# EAGLE board TFG_V.1.1 (EAGLE 9.6.2)

Size 100 x 80 mm. Coordinates in mm from the lower left corner, seen from the top.
Outline: 0,0 100,0 100,80 0,80 0,0
Copper layers (1*16): Top 0.035mm / dielectric 1.5mm / Bottom 0.035mm
Design rules "default": minimum track width 6mil, minimum drill 0.35mm, track to track 6mil, track to pad 6mil, pad to pad 6mil, via to via 6mil, smd to smd 6mil, copper to edge 40mil, drill to drill 6mil, minimum pad ring 10mil, minimum via ring 8mil, stop-mask expansion 4mil, vias tented up to drill 0mil, thermal gap 10mil

## Footprints (pad centres in the part's own frame; a part is rotated, then mirrored left to right if it is on the bottom)
C2.5-3 = drill 0.813 pad 1.6 octagon: 1 -1.27,0; 2 1.27,0
QFN40P800X800X100-69N = smd 0.85 x 0.2: 1 -3.95,3.2; 2 -3.95,2.8; 3 -3.95,2.4; 4 -3.95,2; 5 -3.95,1.6; 6 -3.95,1.2; 7 -3.95,0.8; 8 -3.95,0.4; 9 -3.95,0; 10 -3.95,-0.4; 11 -3.95,-0.8; 12 -3.95,-1.2; 13 -3.95,-1.6; 14 -3.95,-2; 15 -3.95,-2.4; 16 -3.95,-2.8; 17 -3.95,-3.2; 35 3.95,-3.2; 36 3.95,-2.8; 37 3.95,-2.4; 38 3.95,-2; 39 3.95,-1.6; 40 3.95,-1.2; 41 3.95,-0.8; 42 3.95,-0.4; 43 3.95,0; 44 3.95,0.4; 45 3.95,0.8; 46 3.95,1.2; 47 3.95,1.6; 48 3.95,2; 49 3.95,2.4; 50 3.95,2.8; 51 3.95,3.2 | smd 0.2 x 0.85: 18 -3.2,-3.95; 19 -2.8,-3.95; 20 -2.4,-3.95; 21 -2,-3.95; 22 -1.6,-3.95; 23 -1.2,-3.95; 24 -0.8,-3.95; 25 -0.4,-3.95; 26 0,-3.95; 27 0.4,-3.95; 28 0.8,-3.95; 29 1.2,-3.95; 30 1.6,-3.95; 31 2,-3.95; 32 2.4,-3.95; 33 2.8,-3.95; 34 3.2,-3.95; 52 3.2,3.95; 53 2.8,3.95; 54 2.4,3.95; 55 2,3.95; 56 1.6,3.95; 57 1.2,3.95; 58 0.8,3.95; 59 0.4,3.95; 60 0,3.95; 61 -0.4,3.95; 62 -0.8,3.95; 63 -1.2,3.95; 64 -1.6,3.95; 65 -2,3.95; 66 -2.4,3.95; 67 -2.8,3.95; 68 -3.2,3.95 | smd 5.8 x 5.8: 69 0,0
FUSAD1926W63L1550D250B = drill 0.83 pad 1.43: 1 -9.63,0; 2 9.63,0
5566-18 = drill 1.4 square: 1 16.8,-2.75; 2 12.6,-2.75; 3 8.4,-2.75; 4 4.2,-2.75; 5 0,-2.75; 6 -4.2,-2.75; 7 -8.4,-2.75; 8 -12.6,-2.75; 9 -16.8,-2.75; 10 16.8,2.75; 11 12.6,2.75; 12 8.4,2.75; 13 4.2,2.75; 14 0,2.75; 15 -4.2,2.75; 16 -8.4,2.75; 17 -12.6,2.75; 18 -16.8,2.75 | hole 3: 21.5,2.29; -21.5,2.29
5566-20 = drill 1.4 square: 1 18.9,-2.75; 2 14.7,-2.75; 3 10.5,-2.75; 4 6.3,-2.75; 5 2.1,-2.75; 6 -2.1,-2.75; 7 -6.3,-2.75; 8 -10.5,-2.75; 9 -14.7,-2.75; 10 -18.9,-2.75; 11 18.9,2.75; 12 14.7,2.75; 13 10.5,2.75; 14 6.3,2.75; 15 2.1,2.75; 16 -2.1,2.75; 17 -6.3,2.75; 18 -10.5,2.75; 19 -14.7,2.75; 20 -18.9,2.75 | hole 3: 23.6,2.29; -23.6,2.29
32005-201 = smd 3.1 x 0.5: 1 3,1.6; 2 3,0.8; 3 3,0; 4 3,-0.8; 5 3,-1.6 | smd 2.5 x 2: M1 -3,-4.45; M2 -3,4.45 | smd 3.3 x 2: M3 2.9,4.45; M4 2.9,-4.45 | hole 0.9: 0,2.2; 0,-2.2

## Placement (x,y rotation side)
C1  0.1uF  [C2.5-3]  17.78,76.2 0 top
IC1  CY8C4248LTQ-L485  [QFN40P800X800X100-69N]  57.15,44.45 180 top
U$1  FUSE  [FUSAD1926W63L1550D250B]  26.67,67.31 90 top
X2  5566-18  [5566-18]  22.86,26.67 270 top
X3  5566-20  [5566-20]  7.62,26.67 270 top
X4  MINI-USB-32005-201  [32005-201]  93.98,72.39 180 top

## Library data of the parts
C1 = capacitor-wima
IC1 = CY8C4248LTQ-L485; DESCRIPTION: ARM Microcontrollers - MCU PSoC4; HEIGHT: 1mm; MANUFACTURER_NAME: Infineon; MANUFACTURER_PART_NUMBER: CY8C4248LTQ-L485
U$1 = 52101-101-REV-A_v16
X2 X3 = con-molex; MF: MOLEX; OC_FARNELL: unknown; OC_NEWARK: unknown
X4 = con-cypressindustries; OC_FARNELL: unknown; OC_NEWARK: unknown

## Nets
DM: IC1.37 X4.2
DP: IC1.36 X4.3
FSR_A1: X2.1
FSR_A2: X2.2
FSR_A3: X2.3
FSR_A4: X2.4
FSR_A5: X2.5
FSR_A6: X2.6
FSR_A7: X2.7
FSR_A8: X2.8
FSR_A9: X2.9
FSR_A10: X2.10
FSR_A11: X2.11
FSR_A12: X2.12
FSR_A13: X2.13
FSR_A14: X2.14
FSR_B1: X3.1
FSR_B2: X3.2
FSR_B3: X3.3
FSR_B4: X3.4
FSR_B5: X3.5
FSR_B6: X3.6
FSR_B7: X3.7
FSR_B8: X3.8
FSR_B9: X3.9
FSR_B10: X3.10
FSR_B11: X3.11
FSR_B12: X3.12
FSR_B13: X3.13
FSR_B14: X3.14
FSR_B15: X3.15
FSR_B16: X3.16
GND: C1.2 X2.18 X3.20 X4.5
I2C_SCL: IC1.46 X2.17 X3.19
I2C_SDA: IC1.47 X2.16 X3.18
N$1: IC1.43
N$2: IC1.42
N$3: IC1.2
N$4: IC1.3
N$5: C1.1 U$1.2 X4.1
N$6: X4.4
N$7: IC1.55
N$8: IC1.54
N$9: IC1.56
N$10: IC1.57
N$11: IC1.58
N$12: IC1.59
N$13: IC1.62
N$14: IC1.63
N$15: IC1.4
N$16: IC1.5
N$17: IC1.6
N$18: IC1.7
N$19: IC1.8
N$20: IC1.9
N$21: IC1.12
N$22: IC1.13
N$23: IC1.14
N$24: IC1.15
N$25: IC1.16
N$26: IC1.17
N$27: IC1.19
N$28: IC1.20
N$29: IC1.21
N$30: IC1.22
N$31: IC1.23
N$32: IC1.24
N$33: IC1.25
N$34: IC1.26
N$35: IC1.28
N$36: IC1.29
N$37: IC1.30
N$38: IC1.31
N$39: IC1.32
N$40: IC1.33
N$41: IC1.34
N$42: IC1.35
N$43: IC1.68
N$44: IC1.67
N$45: IC1.66
N$46: IC1.65
N$47: IC1.64
N$48: IC1.49
N$49: IC1.48
N$50: IC1.45
N$51: IC1.44
N$52: IC1.41
N$53: IC1.40
N$54: IC1.39
VCC: IC1.38 U$1.1 X2.15 X3.17

## Tracks (layer width: path | path; a pad name or v marks a point on that pad's centre or on a via)
DM  (1 unrouted)
DP  (1 unrouted)
GND  (3 unrouted)
I2C_SCL  (2 unrouted)
I2C_SDA  (2 unrouted)
N$5  (2 unrouted)
VCC  (3 unrouted)